# Altium PCB Micro+Complete+Ver1.3.pcbdoc
Units mil, origin at the board's own origin, x right, y up, seen from the top; angles counter-clockwise.
Board outline 3500 x 2200 mil, 2 copper layers (Top Layer, Bottom Layer); 49 components, 71 nets, 195 pads, 92 vias.
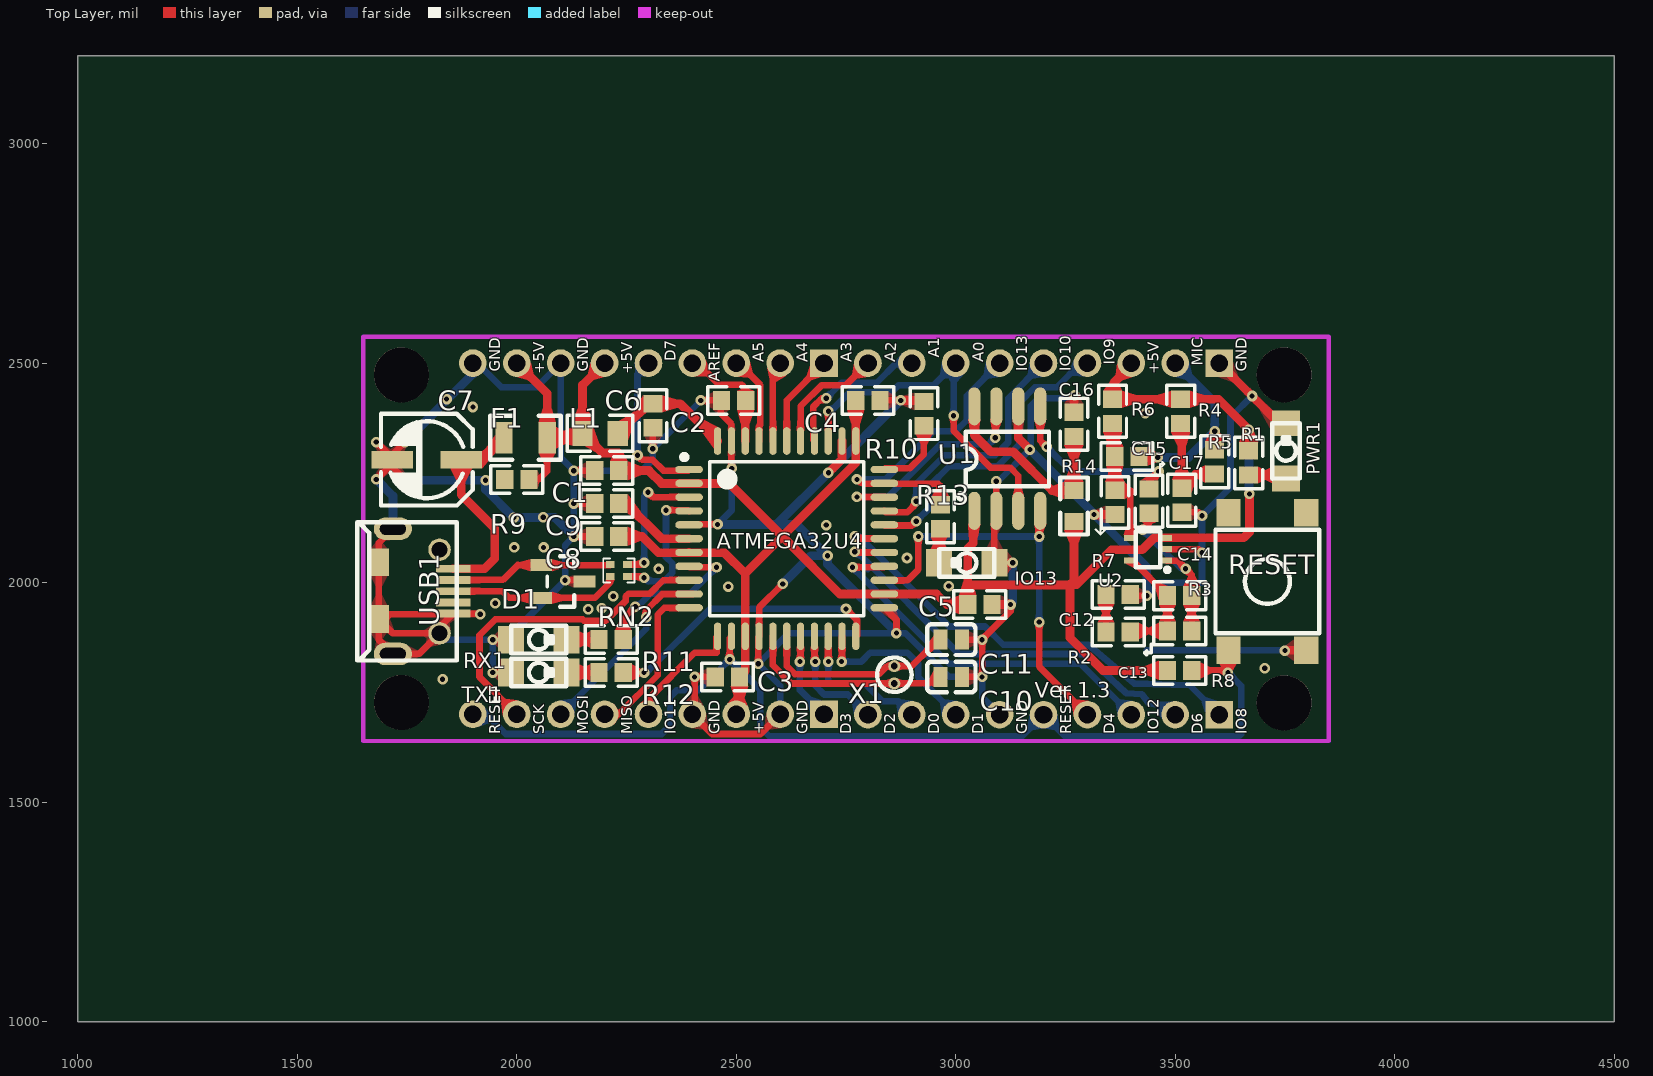
[diagram p0: Top Layer view]
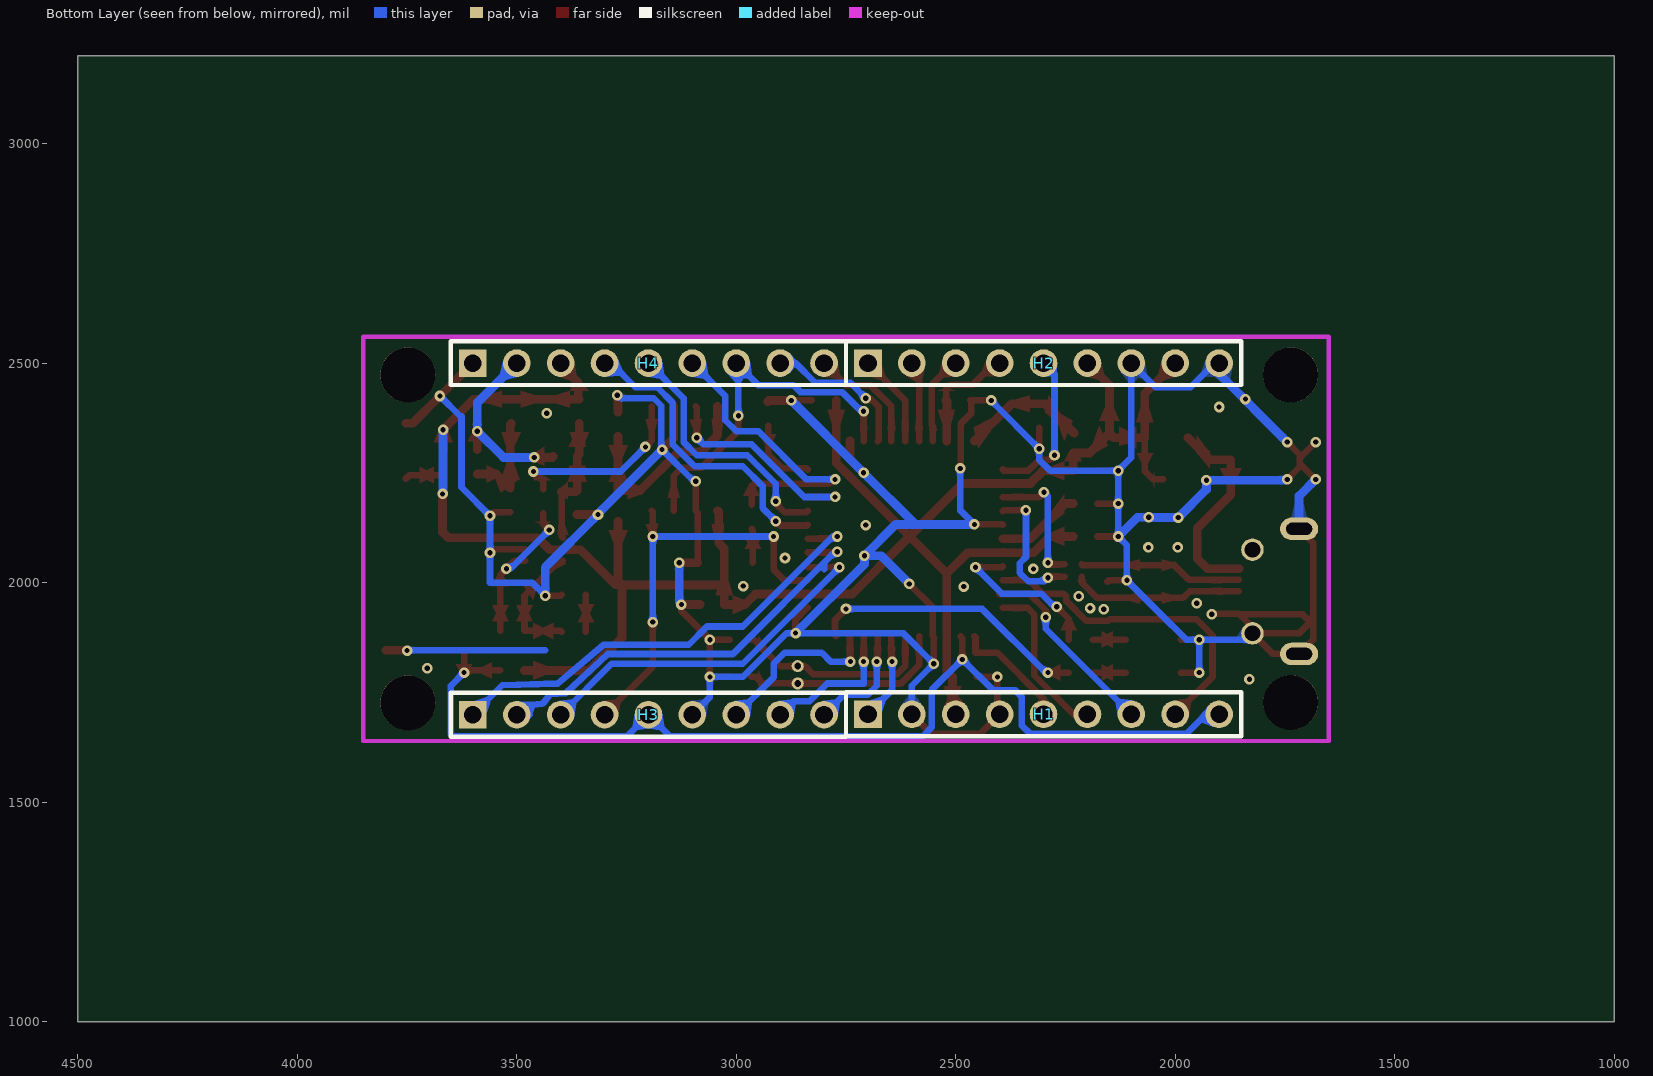
[diagram p1: Bottom Layer view, seen from below]

## Layer stack, top to bottom
Top Layer: signal copper (thickness not stored)
Dielectric: dielectric 12.6, FR-4, Dk 4.8
Bottom Layer: signal copper (thickness not stored)

## Board outline
4500,1000 1000,1000 1000,3200 4500,3200

## Components (designator, comment, footprint, x,y, rotation, side; value= is the part's Value field where it differs from the comment)
ATMEGA32U4 "ATMEGA32U4-AU" QFP-44_10X10X08P 2615,2100 r0 top
C1 "100nF" 0603 2205,2255 r0 top
C2 "100nF" 0603 2494,2415 r0 top
C3 "100nF" 0603 2480,1785 r0 top
C4 "100nF" 0603 2800,2415 r180 top
C5 "100nF" 0603 3055,1950 r180 top
C6 "1uF" 0603 2310,2380 r90 top
C7 "22uF" CAP-SMD_BD5.0-L5.3-W5.3-FD 1795,2280 r180 top
C8 "100nF" 0603 2205,2105 r0 top
C9 "1uF" 0603 2205,2180 r180 top
C10 "22pF" CAP_0603 2990,1785 r0 top
C11 "22pF" CAP_0603 2990,1870 r180 top
C12 "1uF" 0603 3370,1972.5 r0 top
C13 "100pF" 0603 3510,1890 r180 top
C14 "100nF" 0603 3515,2187.5 r270 top
C15 "10nF" 0603 3390,2287.5 r180 top
C16 "33pF" 0603 3269.25,2360.56 r270 top
C17 "10nF" 0603 3440,2185.44 r90 top
D1 "AZ5125-02S.R7G" SOT-23-3_L2.9-W1.6-P1.90-LS2.8-BR 2105,2002.5 r180 top
F1 "SMD1206P050TF/15" FUSE-1206 2020,2330 r0 top
H1 "A2541WV-9P" SIP-2.54MM-9P-CJT-H8.54 2300,1700 r180 bottom
H2 "A2541WV-9P" SIP-2.54MM-9P-CJT-H8.54 2300,2500 r180 bottom
H3 "A2541WV-9P" SIP-2.54MM-9P-CJT-H8.54 3200,1699 r180 bottom
H4 "A2541WV-9P" SIP-2.54MM-9P-CJT-H8.54 3200,2500 r180 bottom
IO13 "LTST-C21KGKT" LED-SMD-3.2X1.6X1.1 3025,2045 r180 top
L1 "30Ω" 0805 2190,2340 r0 top
PWR1 "LTST-C21TBKT" LED-SMD-3.2X1.6X1.1 3752.5,2300 r90 top
R1 "1K" 0603 3667.5,2272.5 r270 top
R2 "10K" 0603 3370,1887.5 r0 top
R3 "100K" 0603 3510,1970 r0 top
R4 "2K" 0603 3512.5,2390 r90 top
R5 "2K" 0603 3590,2275 r270 top
R6 "1M" 0603 3357.5,2390 r90 top
R7 "1M" 0603 3362.5,2182.5 r90 top
R8 "10K" 0603 3510,1800 r180 top
R9 "10K" 0603 2000.06,2235 r0 top
R10 "1K" 0603 2927.5,2385 r90 top
R11 "1K" 0603 2215,1870 r180 top
R12 "1K" 0603 2215,1795 r180 top
R13 "1K" 0603 2965,2150 r270 top
R14 "200K" R0603 3269.25,2174.43 r270 top
RESET "TSA063G50-250" SW-SMD-T6X6-9.5X5.8 3710,2002.5 r90 top
RN2 "22" RES-ARRAY-SMD_0402-4P-L1.0-W1.0-BL 2232.5,2027.5 r90 top
RX1 "LTST-C21KSKT" LED-SMD-3.2X1.6X1.1 2050,1870 r0 top
TX1 "LTST-C21KSKT" LED-SMD-3.2X1.6X1.1 2050,1795 r0 top
U1 "MSGEQ7SOIC" SOIC-8 3117.5,2282.5 r90 top
U2 "MAX4466EXK+T" SC-70-5 3438,2076 r90 top
USB1 "micro USBFemale" MICRO-USB-1 1770,1980 r180 top
X1 "16MHz" TXAL-1.9*6 2860,1790 r90 top

## Footprints (in the part's own frame and the unit in brackets; to place one, negate y for a bottom-side part, rotate by r counter-clockwise, add the part's x,y. Pads: shape width x height; smd on the part's side, far side on the other; paste and mask are expansions set on the pad)
0603 [mm]
  rect 1x1.1 smd: 1(-0.7,0) 2(0.7,0)
  silkscreen extent -1.5,-0.8 1.5,0.8
0805 [mm]
  rect 1.16x1.45 smd: 1(-1.016,0) 2(1.016,0)
  silkscreen extent -1.9,-1.03 1.87,1.04
CAP-SMD_BD5.0-L5.3-W5.3-FD [mm]
  rect 2.4x1 smd: 1(-2,0) 2(2,0)
  silkscreen extent -2.65,-2.65 2.65,2.65
CAP_0603 [mm]
  rect 0.8x1.15 smd: 1(-0.625,0) 2(0.625,0)
  silkscreen extent -1.4,-0.89 1.4,0.89
FUSE-1206 [mm]
  rect 1x1.801 smd: 1(-1.25,0) 2(1.25,0)
  silkscreen extent -2.03,-1.27 2.03,1.27
LED-SMD-3.2X1.6X1.1 [mm]
  rect 1.5x1.6 smd: 1(-1.6,0) 2(1.6,0)
  silkscreen extent -1.6,-0.8 1.6,0.8
MICRO-USB-1 [mm]
  round 1.3 hole 0.9: 0(-1.371,2.431) 0(-1.371,-2.41)
  oval 2.2x1.3 hole 0.7 slot 1.5 at 0 deg: 0(1.329,3.619) 0(1.329,-3.619)
  rect 1.2x1.6 smd: 0(2.14,-1.683) 0(2.156,1.596)
  rect 2x0.45 smd: 1(-2.156,-1.31) 2(-2.156,-0.66) 3(-2.156,-0.01) 4(-2.156,0.64) 5(-2.156,1.29)
  silkscreen extent -2.36,-4 3.4,4
QFP-44_10X10X08P [mm]
  oval 1.6x0.42 smd: 1(-5.65,4) 2(-5.65,3.2) 3(-5.65,2.4) 4(-5.65,1.6) 5(-5.65,0.8) 6(-5.65,0) 7(-5.65,-0.8) 8(-5.65,-1.6) 9(-5.65,-2.4) 10(-5.65,-3.2) 11(-5.65,-4) 23(5.65,-4) 24(5.65,-3.2) 25(5.65,-2.4) 26(5.65,-1.6) 27(5.65,-0.8) 28(5.65,0) 29(5.65,0.8) 30(5.65,1.6) 31(5.65,2.4) 32(5.65,3.2) 33(5.65,4)
  oval 0.42x1.6 smd: 12(-4,-5.65) 13(-3.2,-5.65) 14(-2.4,-5.65) 15(-1.6,-5.65) 16(-0.8,-5.65) 17(0,-5.65) 18(0.8,-5.65) 19(1.6,-5.65) 20(2.4,-5.65) 21(3.2,-5.65) 22(4,-5.65) 34(4,5.65) 35(3.2,5.65) 36(2.4,5.65) 37(1.6,5.65) 38(0.8,5.65) 39(0,5.65) 40(-0.8,5.65) 41(-1.6,5.65) 42(-2.4,5.65) 43(-3.2,5.65) 44(-4,5.65)
  silkscreen extent -6.08,-4.45 4.45,4.87
R0603 [mm]
  rect 1x1.1 smd: 1(-0.9,0) 2(0.9,0)
  silkscreen extent -1.65,-0.8 1.65,0.8
RES-ARRAY-SMD_0402-4P-L1.0-W1.0-BL [mm]
  rect 0.389x0.5 smd: 1(-0.35,-0.5) 2(0.35,-0.5) 3(0.35,0.5) 4(-0.35,0.5)
  silkscreen extent -0.7,-0.9 0.7,0.9
SC-70-5 [mil]
  rect 13.8x23.62 smd: 1(-26,-43) 2(0,-43) 3(26,-43) 4(26,43) 5(-26,43)
  silkscreen extent -52,-49 41,28
SIP-2.54MM-9P-CJT-H8.54 [mm]
  rect 1.6x1.6 hole 1.02: 1(-10.16,0)
  round 1.6 hole 1.02: 2(-7.62,0) 3(-5.08,0) 4(-2.54,0) 5(0,0) 6(2.54,0) 7(5.08,0) 8(7.62,0) 9(10.16,0)
  silkscreen extent -11.43,-1.27 11.43,1.27
SOIC-8 [mm]
  oval 2.2x0.7 smd: 1(-3.023,1.905) 2(-3.023,0.635) 3(-3.023,-0.635) 4(-3.023,-1.905) 5(3.023,-1.905) 6(3.023,-0.635) 7(3.023,0.635) 8(3.023,1.905)
  silkscreen extent -2.37,-2.41 1.55,2.83
SOT-23-3_L2.9-W1.6-P1.90-LS2.8-BR [mm]
  rect 1.25x0.7 smd: 1(1.25,-0.95) 2(1.25,0.95) 3(-1.25,0)
  silkscreen extent -0.65,-1.46 0.9,1.46
SW-SMD-T6X6-9.5X5.8 [mm]
  rect 1.6x1.4 smd: 1(-3.975,2.249) 2(3.975,2.249) 3(-3.975,-2.249) 4(3.975,-2.249)
  silkscreen extent -3,-3 3,3
TXAL-1.9*6 [mm]
  round 0.7 hole 0.4: 1(-0.5,0) 2(0.5,0)
  silkscreen extent -1,-1 1,1

## Free pads (board coordinates)
  round 125 hole 125 unplated: ""(1737,1727) ""(1737,2473) ""(3748,1726) ""(3748,2473)

## Via types
v1: diameter 24, hole 12, Top Layer to Bottom Layer, 92 vias

## Nets (pads, with @x,y where several pads share a name; then routed paths per layer and width w, separated by ;. In a path a pad name is that pad's centre, name@x,y a point inside that pad or via, vN(x,y) a via of type N, cw(c..) or ccw(c..) an arc to the next point about the centre after c; other vN are vias at no path point)
+5V: ATMEGA32U4.2 ATMEGA32U4.7 ATMEGA32U4.14 ATMEGA32U4.24 ATMEGA32U4.34 C1.2 C3.2 C4.2 C5.2 C8.2 F1.2 H1.3 H2.6 H2.8 H4.3 L1.1 R1.1 R4.2 R6.2 R8.2 R9.2 R14.2 U1.1 U2.3 | length 4957.3
  Top Layer w15: R9.2 2050,2235 2069.2,2254.2 F1.2
  Top Layer w20: H2.8 2069.21,2430.79 F1.2 2140,2330 L1.1 ; H2.6 2150,2450 L1.1 ; C8.2 2286,2105 2323,2068 ATMEGA32U4.7@2392.1,2068 ; ATMEGA32U4.7 ATMEGA32U4.7@2392.1,2068 ; H1.3 2507.56,1707.56 C3.2 2520.51,1797.95 ATMEGA32U4.14 2520.51,2020.51 ; C4.2 ATMEGA32U4.34@2772.44,2322.48 ; ATMEGA32U4.34 ATMEGA32U4.34@2772.44,2322.48 ; 3027.45,1994.52 3259.52,1994.52 3260,1995 ; U1.1 3040,2161 3040,2090 3027.45,2077.45 C5.2 2980,1950 2955.98,1974.02 ATMEGA32U4.24 2735.98,1974.02 2615,2095 2484,2226 ATMEGA32U4.2 2330,2226 2301,2255 2232.5,2255 2232.5,2295.4 2194.6,2295.4 L1.1 ; R14.2@3269.25,2139 3269.25,2004.25 3260,1995 ; H4.3 3400,2495 3360,2455 3360,2420.05 R6.2 R4.2 3598.45,2417.55 v1(3668,2348) 3667.5,2347.5 R1.1 ; R8.2 3335,1800 3260,1875 3260,1995 ; v1(3669,2202) 3669,2115 3656,2102 U2.3 3452,2102 3425,2075 3355,2075 3275,1995 3260,1995 ; ATMEGA32U4.7@2392.1,2068 2473.02,2068 2520.51,2020.51 ; 2520.51,2020.51 2772.44,2272.44 ATMEGA32U4.34@2772.44,2322.48
  Bottom Layer w20: v1(3668,2348) 3668,2203 v1(3669,2202)
A0: ATMEGA32U4.36 H4.7 U1.3 | length 829.4
  Top Layer w15: ATMEGA32U4.36 2710,2322.9 v1(2710,2390) ; v1(2995,2380) 2995,2346 3079,2262 3124,2262 3142.5,2243.5 U1.3
  Bottom Layer w15: v1(2710,2390) 2715,2390 2758.93,2433.93 2853.93,2433.93 2870,2450 2950,2450 H4.7 2995,2495 v1(2995,2380)
A1: ATMEGA32U4.37 H4.8 | length 345.4
  Top Layer w15: ATMEGA32U4.37 2675,2325.4 2675,2400.2 2694.8,2420 v1(2705,2420)
  Bottom Layer w15: v1(2705,2420) 2740,2455 2820,2455 2865,2500 H4.8
A2: ATMEGA32U4.38 H4.9 | length 273.4
  Top Layer w15: ATMEGA32U4.38 2646.5,2401.5 2695,2450 2750,2450 H4.9
A3: ATMEGA32U4.39 H2.1 | length 212.8
  Top Layer w15: ATMEGA32U4.39 2615,2415 H2.1
A4: ATMEGA32U4.40 H2.2 | length 184.4
  Top Layer w15: ATMEGA32U4.40 2583.5,2483.5 H2.2
A5: ATMEGA32U4.41 H2.3 | length 204.5
  Top Layer w15: H2.3 2505,2500 2555,2450 2555,2360 2552.01,2357.01 ATMEGA32U4.41
AREF: ATMEGA32U4.42 C2.2 H2.4 | length 265.9
  Top Layer w15: H2.4 2412,2500 2461.78,2450.22 2512.78,2450.22 2521.56,2441.44 C2.2
  Top Layer w20: ATMEGA32U4.42 2520,2412.5 C2.2@2522.5,2415
AVCC2: ATMEGA32U4.44 C6.2 L1.2 | length 290.8
  Top Layer w20: L1.2 2297.56,2407.56 C6.2 2372.4,2407.56 ATMEGA32U4.44
C12_1: C12.1 R2.1 | length 85
  Top Layer w15: R2.1 C12.1
D0/RX: ATMEGA32U4.20 H3.8 | length 327.2
  Top Layer w15: ATMEGA32U4.20 2709.49,1820.51 v1(2710,1820)
  Bottom Layer w15: v1(2710,1820) 2710,1770 2792.71,1770 2832.71,1730 2869,1730 H3.8
D1/TXT: ATMEGA32U4.21 H3.7 | length 402.8
  Top Layer w15: v1(2740,1820) 2740.98,1820.98 ATMEGA32U4.21
  Bottom Layer w15: v1(2740,1820) 2785,1820 2805,1840 2890,1840 2915,1815 2915,1784 H3.7
D2/SDA: ATMEGA32U4.19 H3.9 | length 260.7
  Top Layer w15: ATMEGA32U4.19 2677.99,1822.01 v1(2680,1820)
  Bottom Layer w15: v1(2680,1820) 2680,1765 2700,1745 2754,1745 H3.9
D3/SCL: ATMEGA32U4.18 H1.1 | length 201
  Top Layer w15: v1(2645,1820) 2646.5,1821.5 ATMEGA32U4.18
  Bottom Layer w15: v1(2645,1820) 2645,1755 H1.1
D4*: ATMEGA32U4.25 H3.4 U1.4 | length 949.2
  Top Layer w15: ATMEGA32U4.25 2837.95,2005 2890,2005 2915,2030 v1(2915,2105) ; v1(3190,1910) 3190,1809 H3.4 ; v1(3190,2105) 3190,2161 U1.4
  Bottom Layer w15: v1(2915,2105) v1(3190,2105) v1(3190,1910)
D5*: ATMEGA32U4.31 U1.7 | length 506.1
  Top Layer w15: v1(2775,2195) 2836.93,2195 ATMEGA32U4.31 ; v1(3090,2330) 3090,2399 U1.7
  Bottom Layer w15: v1(2775,2195) 2845,2195 2965,2315 3075,2315 v1(3090,2330)
D6*: ATMEGA32U4.27 H3.2 | length 988.5
  Top Layer w15: v1(2770,2070) 2771.5,2068.5 ATMEGA32U4.27
  Bottom Layer w15: v1(2770,2070) 2775,2070 3007.75,1837.25 3292.75,1837.25 3388,1748 3424,1746 3439.89,1725.11 3443,1724 3479,1720 H3.2 H3.2@3471,1699 ; 2799.8,2030 2799.8,2040.2
D7: ATMEGA32U4.1 H2.5 | length 353.5
  Top Layer w15: v1(2275,2290) 2285.6,2279.4 2309.9,2279.4 2334.3,2255 2390.1,2255 ATMEGA32U4.1
  Bottom Layer w15: v1(2275,2290) 2275,2475 H2.5
D+: ATMEGA32U4.4 RN2.1 | length 316.4
  Top Layer w15: RN2.1 2287.28,2013.72 v1(2290,2011) ; v1(2340,2165) 2390.6,2165 ATMEGA32U4.4
  Bottom Layer w15: v1(2290,2011) 2298,2003 2335,2003 2354,2022 2354,2044 2340,2058 v1(2340,2165)
D-: ATMEGA32U4.3 RN2.2 | length 302.5
  Top Layer w15: RN2.2 2286.28,2041.28 v1(2290,2045) ; v1(2299,2206) 2310.5,2194.5 ATMEGA32U4.3
  Bottom Layer w15: v1(2290,2045) 2290,2197 v1(2299,2206)
GND: ATMEGA32U4.5 ATMEGA32U4.15 ATMEGA32U4.23 ATMEGA32U4.35 ATMEGA32U4.43 C1.1 C2.1 C3.1 C4.1 C5.1 C6.1 C7.2 C8.1 C9.2 C10.2 C11.1 C12.2 C14.2 C16.1 D1.3 H1.2 H1.4 H2.7 H2.9 H3.6 H4.1 IO13.1 PWR1.2 R7.1 R9.1 R10.2 RESET.3 RX1.1 TX1.1 U1.2 U1.6 U2.2 USB1.0 USB1.5 | length 9894.5
  Top Layer w15: v1(1680,2235) 1716.3,2271.3 C7.2 ; v1(1680,2320) 1716.3,2283.7 C7.2 ; USB1.0@1717.7,2122.5 1685.8,2090.6 1685.8,2046.3 1685.8,1917.8 USB1.0@1685.1,1917.2 ; v1(1745,2235) 1716.3,2263.7 C7.2 ; v1(1745,2320) 1716.3,2291.3 C7.2 ; v1(1917,1928) 1915.8,1929.2 USB1.5 ; v1(1945,1795) TX1.1 ; v1(1945,1870) RX1.1 ; v1(2110,2005) 2151.7,2005 D1.3 ; v1(2130,2105) C8.1 ; v1(2130,2180) C9.2 ; v1(2130,2255) C1.1 ; v1(2310,2305) C6.1 ; ATMEGA32U4.5 2393.6,2132.5 v1(2457.5,2132.5) ; v1(2419,2415) C2.1 2465,2413.6 2465,2385 2489,2361 ATMEGA32U4.43 2489,2261 v1(2490,2260) ; C3.1 v1(2405,1785) 2405,1705 cw(c2400,1705) H1.4 2445,1655 2555,1655 H1.2 ; v1(2550,1815) 2550,1875.5 ATMEGA32U4.15 ; ATMEGA32U4.15 2552.01,1943.01 v1(2606,1997) ; C4.1 v1(2875,2415) ; ATMEGA32U4.23 2865,1915 v1(2865,1885) ; C10.2 v1(3060,1785) v1(3060,1870) ; C11.1 v1(3060,1870) ; IO13.1 3088,2159 U1.2 3092.5,2230.5 v1(3092,2231) ; v1(3125,1950) 3125,1935 v1(3060,1870) ; C12.2 3400.1,1970 v1(3435,1970) ; U2.2 3553,2076 v1(3561,2068) ; C14.2 3553.1,2159.9 v1(3561,2152) ; USB1.0@1685.1,1917.2 1718,1884.3 USB1.0@1824,1884.3 ; USB1.0@1685.1,1917.2 1685.1,1870.1 1717.7,1837.5 1777.2,1837.5 USB1.0@1824,1884.3 ; USB1.0@1685.1,1917.2 1699.7,1917.2 1710,1927.5 1853.1,1927.5 USB1.5 ; USB1.0@1824,1884.3 1824,1898.3 USB1.5
  Top Layer w20: v1(2710,2250) 2741,2281 ATMEGA32U4.35 ; v1(2875,2415) 2925.1,2415 R10.2 ; C5.1 v1(3125,1950) ; IO13.1 v1(3130,2045) ; U1.6 3142.5,2329.5 v1(3169,2303) ; C16.1 3269.2,2425.2 v1(3271,2427) ; v1(3315,2155) 3362.4,2155 R7.1 ; H4.1 v1(3675,2425) 3737,2363 PWR1.2 ; v1(3750,1845) 3751,1846 RESET.3@3798.5,1846
  Bottom Layer w15: USB1.0@1823.99,1884.3 1838.29,1870 v1(1945,1870) ; H2.9 1910,2500 1965,2445 2045,2445 H2.7 2100,2285 v1(2130,2255) ; v1(1945,1795) v1(1945,1870) ; v1(2419,2415) 2419,2414 v1(2310,2305) 2310,2280 2285,2255 v1(2130,2255) ; v1(2457.5,2132.5) 2490,2165 v1(2490,2260) ; H1.2 2600,1765 v1(2550,1815) 2620,1885 v1(2865,1885) 2885,1885 2985,1785 v1(3060,1785) 3060,1739 H3.6 ; v1(3092,2231) 3097,2231 v1(3169,2303) 3171,2305 3171,2403 3188,2420 3264,2420 v1(3271,2427) ; 3435,1846.22 3748.78,1846.22 v1(3750,1845) ; v1(3435,1970) 3465,2000 3561,2000 v1(3561,2068) v1(3561,2152) 3626,2217 3626,2379 3629,2379 v1(3675,2425) ; v1(1945,1870) 1975,1870 2037,1932 v1(2110,2005) 2110,2085 v1(2130,2105) v1(2130,2180) v1(2130,2255)
  Bottom Layer w20: v1(1680,2235) 1717.7,2197.3 USB1.0@1717.7,2122.5 ; v1(1745,2235) 1747,2233 v1(1929,2233) 1929,2212 v1(1993,2148) v1@2060,2148 ; v1(1745,2320) 1900,2475 H2.9 ; v1(2060,2149) 2086,2149 v1(2130,2105) ; v1(2457.5,2132.5) 2636.5,2132.5 v1(2708,2061) ; 2591.56,2132.5 2592.5,2132.5 v1(2710,2250) v1(2875,2415) ; v1(2606,1997) 2670,2061 v1(2708,2061) ; v1(2865,1885) 2708,2042 v1(2708,2061) ; v1(3125,1950) 3130,1955 v1(3130,2045) ; v1(3169,2303) 3315,2157 v1(3315,2155) 3435,2035 v1(3435,1970)
  other v1: 1831,1780 3704,1805 2163,1939 2194,1942 1951,1953 2220,1969 2482,1991 2984,1992 2323,2031 2889,2056 1994,2080 2061,2080 2705,2131 3432,2386 1900,2400 1840,2418
HWB: ATMEGA32U4.33 R10.1 | length 169.5
  Top Layer w15: ATMEGA32U4.33 2840,2260 2895,2260 2927.5,2292.5 R10.1
IO8: ATMEGA32U4.28 H3.1 | length 1061.7
  Top Layer w15: v1(2770,2105) 2774.92,2100.08 ATMEGA32U4.28@2837.44,2100.08
  Bottom Layer w15: v1(2770,2105) 2780,2105 2985,1900 3066.7,1900 3108.3,1858.3 3301.7,1858.3 3407,1770 3532.9,1766.1 H3.1
IO9*: ATMEGA32U4.29 H4.4 | length 701.4
  Top Layer w15: ATMEGA32U4.29 2838.94,2130 2900,2130 v1(2910,2140)
  Bottom Layer w15: v1(2910,2140) 2940,2170 2940,2220 2985,2265 3095,2265 3145,2315 3145,2410 3180,2445 3230,2445 3285,2500 H4.4
IO10*: ATMEGA32U4.30 H4.5 | length 589.6
  Top Layer w15: ATMEGA32U4.30 2840.43,2160 2890,2160 2910,2180 v1(2910,2185)
  Bottom Layer w15: v1(2910,2185) 2910,2225 2975,2290 3090,2290 3120,2320 3120,2420 H4.5
IO11*: ATMEGA32U4.12 H1.5 | length 272.1
  Top Layer w15: H1.5 2300,1735 2405,1840 2455,1840 2455,1875 ATMEGA32U4.12
IO12*/PD6: ATMEGA32U4.26 H3.3 | length 847.4
  Top Layer w15: v1(2765,2035) 2835.43,2035 ATMEGA32U4.26
  Bottom Layer w15: v1(2765,2035) 2985,1815 3284,1815 H3.3
IO13: ATMEGA32U4.32 H4.6 R13.1 | length 706.4
  Top Layer w15: v1(2775,2235) 2780,2235 2790,2225 2836.46,2225 ATMEGA32U4.32 2838.42,2225 2960,2225 2965,2220 R13.1
  Bottom Layer w15: v1(2775,2235) 2840,2235 2950,2345 3000,2345 3025,2370 3025,2425 H4.6
IO13_2: IO13.2 R13.2 | length 78.7
  Top Layer w15: IO13.2 2962.01,2119.45 R13.2
MIC: C15.1 H4.2 R5.1 | length 433
  Top Layer w20: C15.1 3420.06,2285 v1(3460,2285) ; R5.1 v1(3590,2345)
  Bottom Layer w20: v1(3460,2285) 3530,2285 v1(3590,2345) 3590,2410 H4.2
MICAUDIO: C13.1 C17.1 R3.2 U2.1 | length 375.3
  Top Layer w15: v1(3426,2120) 3440,2134 C17.1 ; U2.1 3505,2050 v1(3523.5,2031.5) 3537.6,2017.4 R3.2 ; C13.1 R3.2
  Bottom Layer w15: v1(3426,2120) 3514.5,2031.5 v1(3523.5,2031.5)
MISO: ATMEGA32U4.11 H1.6 | length 373.9
  Top Layer w15: H1.6 2232,1700 2321,1789 2321,1927 2336.5,1942.5 ATMEGA32U4.11
MOSI: ATMEGA32U4.10 H1.7 | length 439.1
  Top Layer w15: v1(2295,1921) 2295,1937 2332,1974 ATMEGA32U4.10 ; ATMEGA32U4.10 ATMEGA32U4.10@2400.98,1974.02
  Bottom Layer w15: H1.7 2295,1895 v1(2295,1921)
null: 
PWR1_1: PWR1.1 R1.2 | length 88.3
  Top Layer w15: R1.2 3744.57,2244.94 PWR1.1
R4_1: C14.1 R4.1 R5.2 | length 236.8
  Top Layer w20: R4.1 3515,2359.94 C14.1 3547.38,2247.44 R5.2
RESET: ATMEGA32U4.13 H1.9 H3.5 R8.1 RESET.1 | length 2384.8
  Top Layer w15: v1(2485,1825) 2485,1873.54 ATMEGA32U4.13 ; R8.1 3615,1800 v1(3620,1795) 3620,1844.55 RESET.1
  Bottom Layer w15: H1.9 1930,1700 1975,1655 2330,1655 2350,1675 2350,1740 2365,1755 2415,1755 v1(2485,1825) 2555,1755 2555,1670 2575,1650 3151,1650 H3.5 3249,1650 3645,1650 3650,1655 3650,1765 v1(3620,1795)
RX1: ATMEGA32U4.8 R11.1 | length 371.9
  Top Layer w15: R11.1 2242.56,1917.56 v1(2270,1945) ; ATMEGA32U4.8 2394.57,2035 v1(2455,2035)
  Bottom Layer w15: v1(2270,1945) 2275,1945 2305,1975 2395,1975 v1(2455,2035)
RX1_2: R11.2 RX1.2 | length 74.5
  Top Layer w15: RX1.2 R11.2
S$29: 
S$31: 
S$67: 
S$69: 
S$80: 
S$82: 
S$84: 
S$86: 
S$1945: 
S$1948: 
S$1950: 
S$1952: 
S$1955: 
S$1957: 
S$1959: 
S$1961: 
S$1973: 
S$1975: 
S$1977: 
SCK: ATMEGA32U4.9 H1.8 | length 753.1
  Top Layer w15: H1.8 1915,1785 1915,1880 1951,1916 2149.89,1916 2152.89,1913 2203,1913 2248,1958 2248,1968 2255,1975 2303.2,1975 2333.71,2005.51 ATMEGA32U4.9
TX1: ATMEGA32U4.22 R12.1 | length 641.3
  Top Layer w15: R12.1 v1(2290,1795) ; v1(2750,1940) 2775,1915 2775,1880.08 ATMEGA32U4.22
  Bottom Layer w15: v1(2290,1795) 2295,1795 2440,1940 v1(2750,1940)
TX1_2: R12.2 TX1.2 | length 74.5
  Top Layer w15: TX1.2 R12.2
U1_5: C17.2 U1.5 | length 425.8
  Top Layer w15: U1.5 3192.5,2323.5 v1(3207,2309) ; C17.2 3440,2231 v1(3462,2253)
  Bottom Layer w15: v1(3207,2309) 3263,2253 v1(3462,2253)
U1_8: C16.2 R14.1 U1.8 | length 467.9
  Top Layer w20: U1.8 3042.5,2335.5 3080,2298 3131,2298 3219.13,2209.87 3269.25,2209.87 C16.2
U2_4: C15.2 R6.1 R7.2 U2.4 | length 297.5
  Top Layer w15: U2.4 3398,2105 3398,2207
  Top Layer w20: R6.1 3357.5,2292.45 C15.2 R7.2@3362.45,2210.1 ; R7.2 R7.2@3362.45,2210.1 ; 3398,2207 3365.55,2207 R7.2@3362.45,2210.1
U2_5: C13.2 R2.2 R3.1 U2.5 | length 286.5
  Top Layer w15: U2.5 3402.44,2050 R3.1 C13.2 3400.06,1890 R2.2
UCAP: ATMEGA32U4.6 C9.1 | length 193.1
  Top Layer w20: C9.1 2250,2180 2330,2100 ATMEGA32U4.6
USB1_1: C7.1 F1.1 USB1.1 | length 479.2
  Top Layer w20: USB1.1 1926.6,2031.6 1950,2055 1950,2124 1873.7,2200.3 C7.1 ; C7.1 1920.79,2280 F1.1
USB1_2: D1.1 RN2.3 USB1.2 | length 372.6
  Top Layer w15: USB1.2 1968.5,2006 2002.5,2040 2002.6,2039.9 D1.1 2211.43,2039.9 RN2.3
USB1_3: D1.2 RN2.4 USB1.3 | length 392.3
  Top Layer w15: USB1.3 1967.1,1980.4 1982.4,1965.1 D1.2 2177.4,1965.1 2177.5,1965 2212.8,2000.3 RN2.4
XTAL1: ATMEGA32U4.17 C11.2 X1.2 | length 458.5
  Top Layer w15: ATMEGA32U4.17 2615,1810 2633.9,1791.1 2825,1791.1 2843.6,1809.7 X1.2 2899.7,1809.7 2960,1870 C11.2
XTAL2: ATMEGA32U4.16 C10.1 X1.1 | length 471.4
  Top Layer w15: ATMEGA32U4.16 2583.5,1811.5 2625,1770 2859.7,1770 X1.1 2940,1770.3 2954.7,1785 C10.1
pads on no net: RESET.2 RESET.4 USB1.4

## Polygon pours and split planes (outlines as drawn)
GND on Bottom Layer (solid): 1500,2700 4000,2700 4000,1500 1500,1500
GND on Top Layer (solid): 1600,2600 3900,2600 3900,1600 1600,1600

## Other copper
Top Layer:
  region net +5V: 3404.56,2468.84 3368.51,2499.37 3364.63,2473.77 3379.94,2460.8
  region net A2: 2768.57,2501.97 2801.97,2468.57 2774.98,2464.38 2764.38,2474.98
  region net A4: 2613.79,2471.68 2570.18,2489.86 2576,2463.55 2591,2457.29
  region net A5: 2531.16,2504.56 2500.63,2468.51 2527.85,2466.54 2537.58,2478.02
  region net AREF: 2430.42,2508.15 2404.29,2468.8 2431.49,2469.9 2439.95,2482.65
  region net +5V: 2168.57,2501.97 2201.97,2468.57 2176.75,2462.61 2162.61,2476.75
  region net +5V: 1998.03,2468.57 2031.43,2501.97 2037.39,2476.75 2023.25,2462.61
  region net +5V: 2480.42,1724.67 2526.93,1716.34 2517.56,1740.42 2497.56,1744
  region net IO11*: 2323.62,1720.83 2276.38,1720.83 2292.5,1735 2307.5,1735
  region net MISO: 2220.83,1676.38 2220.83,1723.62 2232,1707.5 2232,1692.5
  region net SCK: 1968.57,1698.03 2001.97,1731.43 1974.98,1735.62 1964.38,1725.02
  region net D4*: 3268.57,1697.03 3301.97,1730.43 3274.98,1734.62 3264.38,1724.02
  region net XTAL2: 2851.05,1759.82 2850.72,1780.49 2841.12,1777.5 2841.36,1762.5
  region net XTAL2: 2869.11,1759.97 2869.11,1780.64 2878.76,1777.8 2878.76,1762.8
  region net XTAL1: 2869.11,1799.36 2869.11,1820.03 2878.76,1817.2 2878.76,1802.2
  region net XTAL1: 2850.89,1799.36 2850.89,1820.03 2843.6,1817.2 2843.6,1802.2
  region net D-: 2310.98,2206.75 2298.25,2194.02 2305.2,2189.2 2315.8,2199.8
  region net D+: 2347.94,2156 2347.94,2174 2356.34,2172.5 2356.34,2157.5
  region net D-: 2284.32,2034.43 2280.22,2051.96 2272.34,2048.78 2275.85,2033.78
  region net D+: 2283.67,2021.2 2280.68,2003.45 2272.62,2006.22 2275.16,2021.22
  region net RESET: 2476,1832.94 2494,1832.94 2492.5,1841.34 2477.5,1841.34
  region net A0: 2701,2382.06 2719,2382.06 2717.5,2373.66 2702.5,2373.66
  region net A1: 2700.39,2408.92 2694.59,2425.96 2686.84,2422.65 2692.23,2406.82
  region net A0: 2986,2372.06 3004,2372.06 3002.5,2363.66 2987.5,2363.66
  region net D7: 2286.98,2290.75 2274.25,2278.02 2280.3,2274.1 2290.9,2284.7
  region net RX1: 2270.75,1933.02 2258.02,1945.75 2253.14,1938.75 2263.75,1928.14
  region net TX1: 2282.06,1786 2282.06,1804 2273.66,1802.5 2273.66,1787.5
  region net RX1: 2447.06,2026 2447.06,2044 2438.66,2042.5 2438.66,2027.5
  region net MOSI: 2286,1928.94 2304,1928.94 2302.5,1937 2287.5,1937
  region net RESET: 3611,1802.94 3629,1802.94 3627.5,1811.34 3612.5,1811.34
  region net RESET: 3615.2,1806 3609.69,1788.86 3602.04,1792.5 3606.86,1807.5
  region net TX1: 2761.98,1940.75 2749.25,1928.02 2756.25,1923.14 2766.86,1933.75
  region net D3/SCL: 2654.69,1827.08 2636.77,1828.73 2639,1836.96 2654,1835.58
  region net D2/SDA: 2687.96,1828.98 2670.09,1826.77 2670.49,1835.28 2685.49,1837.14
  region net D0/RX: 2718.75,1828.21 2700.76,1827.65 2701.99,1836.09 2716.99,1836.56
  region net D1/TXT: 2749.46,1827.38 2731.49,1828.46 2733.48,1836.76 2748.48,1835.86
  region net IO12*/PD6: 2772.94,2026 2772.94,2044 2781.34,2042.5 2781.34,2027.5
  region net D6*: 2778.73,2078.23 2777.08,2060.31 2785.58,2061 2786.96,2076
  region net IO8: 2780.28,2111.19 2774.86,2094.03 2783.21,2092.58 2787.95,2107.58
  region net D4*: 2906,2097.06 2924,2097.06 2922.5,2088.66 2907.5,2088.66
  region net D4*: 3181,2112.94 3199,2112.94 3197.5,2121.34 3182.5,2121.34
  region net D4*: 3181,1902.06 3199,1902.06 3197.5,1893.66 3182.5,1893.66
  region net MIC: 3581,2337.06 3599,2337.06 3600,2328.66 3580,2328.66
  region net MIC: 3452.06,2276 3452.06,2294 3443.66,2295 3443.66,2275
  region net U1_5: 3207.75,2320.98 3195.03,2308.25 3190.15,2315.25 3200.75,2325.85
  region net D5*: 3081,2337.94 3099,2337.94 3097.5,2346.34 3082.5,2346.34
  region net IO9*: 2910.75,2128.02 2898.02,2140.75 2894.7,2135.3 2905.3,2124.7
  region net IO10*: 2898.14,2183.14 2913.33,2173.47 2907.7,2167.09 2894.74,2175.35
  region net IO13: 2786.53,2238.33 2776.86,2223.14 2784.65,2219.74 2792.91,2232.7
  region net D5*: 2782.94,2186 2782.94,2204 2791.34,2202.5 2791.34,2187.5
  region net MICAUDIO: 3524.25,2043.48 3511.52,2030.75 3506.65,2037.75 3517.25,2048.35
  region net MICAUDIO: 3535.48,2032.25 3522.75,2019.52 3529.75,2014.64 3540.36,2025.25
  region net MICAUDIO: 3437.98,2119.25 3425.25,2131.98 3432.25,2136.86 3442.86,2126.25
  region net U1_5: 3462.75,2241.02 3450.03,2253.75 3445.15,2246.75 3455.75,2236.15
  region net +5V: 3676.75,2339.79 3658.76,2340.34 3657.5,2331.98 3677.5,2331.37
  region net +5V: 3668.75,2359.98 3656.02,2347.25 3649.37,2352.48 3663.52,2366.62
  region net +5V: 3660,2194.06 3678,2194.06 3679,2185.66 3659,2185.66
  region net A3: 2695.02,2468.5 2668.5,2495.02 2660.55,2471.16 2671.16,2460.55
  region net R4_1: 3534.16,2342.75 3490.84,2342.75 3505,2312.75 3525,2312.75
  region net +5V: 3490.84,2397.87 3490.84,2437.24 3460.84,2427.55 3460.84,2407.55
  region net +5V: 3534.16,2437.24 3534.16,2397.87 3564.16,2407.55 3564.16,2427.55
  region net U2_4: 3379.16,2342.75 3335.84,2342.75 3347.5,2312.75 3367.5,2312.75
  region net +5V: 3379.16,2437.24 3379.16,2397.87 3409.16,2407.55 3409.16,2427.55
  region net +5V: 3335.84,2437.24 3379.16,2437.24 3370,2455 3350,2455
  region net USB1_1: 1951.1,2294.55 1951.1,2335.31 1921.1,2294.45 1921.1,2266.17
  region net +5V: 2088.9,2355 2088.9,2305 2118.9,2320 2118.9,2340
  region net +5V: 2049.53,2365.45 2088.9,2365.45 2079.21,2395.45 2059.21,2395.45
  region net +5V: 2087.95,2294.55 2050.45,2294.55 2061.7,2272.05 2076.7,2272.05
  region net USB1_1: 1920.98,2299.69 1920.98,2260.31 1950.98,2296.05 1950.98,2324.34
  region net USB1_1: 1898.7,2260.31 1848.7,2260.31 1863.7,2230.31 1883.7,2230.31
  region net +5V: 2252.24,2126.65 2252.24,2083.35 2282.24,2095 2282.24,2115
  region net USB1_3: 2031.19,1951.32 2031.19,1978.88 2008.69,1972.6 2008.69,1957.6
  region net USB1_3: 2080.41,1978.88 2080.41,1951.32 2102.91,1957.6 2102.91,1972.6
  region net USB1_2: 2031.19,2026.12 2031.19,2053.68 2008.69,2047.4 2008.69,2032.4
  region net USB1_2: 2080.41,2053.68 2080.41,2026.12 2102.91,2032.4 2102.91,2047.4
  region net RX1_2: 2142.52,1888.75 2142.52,1851.25 2165.02,1862.5 2165.02,1877.5
  region net TX1_2: 2142.52,1813.75 2142.52,1776.25 2165.02,1787.5 2165.02,1802.5
  region net USB1_3: 1894.25,1989.27 1894.25,1971.55 1916.75,1972.9 1916.75,1987.9
  region net USB1_2: 1894.25,2014.86 1894.25,1997.14 1916.75,1998.5 1916.75,2013.5
  region net PWR1_1: 3721.01,2226.19 3721.01,2263.69 3698.51,2252.44 3698.51,2237.44
  region net +5V: 2527.24,1763.35 2487.87,1763.35 2497.56,1733.35 2517.56,1733.35
  region net +5V: 3007.76,1971.65 3047.13,1971.65 3037.45,2001.65 3017.45,2001.65
  region net +5V: 3007.76,1928.35 3007.76,1971.65 2980,1960 2980,1940
  region net UCAP: 2252.25,2201.65 2252.25,2158.35 2282.25,2133.61 2282.25,2161.89
  region net +5V: 2127.17,2311.46 2127.17,2355 2097.17,2340 2097.17,2320
  region net +5V: 2172.83,2357.48 2153.28,2311.46 2179.47,2296.38 2187.91,2316.23
  region net +5V: 2127.17,2368.54 2172.83,2368.54 2160,2398.54 2140,2398.54
  region net AVCC2: 2233.28,2368.54 2252.83,2322.52 2267.91,2363.77 2259.47,2383.62
  region net AVCC2: 2295.71,2387.87 2288.35,2427.24 2264.96,2389.1 2269.42,2365.28
  region net AVCC2: 2331.65,2427.24 2331.65,2387.87 2361.65,2397.56 2361.65,2417.56
  region net USB1_3: 2222.66,2006.06 2202.97,2006.06 2205.3,2000.3 2220.3,2000.3
  region net D-: 2262.03,2048.94 2262.03,2033.62 2284.53,2033.78 2284.53,2048.78
  region net D+: 2262.03,2021.38 2262.03,2006.06 2284.53,2006.22 2284.53,2021.22
  region net U2_5: 3501.2,1948.35 3463.7,1948.35 3474.95,1925.85 3489.95,1925.85
  region net U2_5: 3462.75,1960.75 3484,1991.65 3462.68,2000.37 3454.04,1987.79
  region net MICAUDIO: 3518.85,1991.65 3556.35,1991.65 3545.1,2014.15 3530.1,2014.15
  region net MICAUDIO: 3556.31,1948.35 3518.81,1948.35 3530.06,1925.85 3545.06,1925.85
  region net +5V: 2212.87,2276.65 2252.24,2276.65 2242.5,2295.4 2222.5,2295.4
  region net +5V: 2252.24,2276.65 2252.24,2233.35 2282.24,2245 2282.24,2265
  region net AREF: 2541.24,2393.35 2501.87,2393.35 2510.27,2363.35 2530.27,2363.35
  region net AREF: 2502.81,2436.65 2540.31,2436.65 2529.06,2441.44 2514.06,2441.44
  region net +5V: 2792.13,2393.35 2752.76,2393.35 2762.44,2363.35 2782.44,2363.35
  region net R4_1: 3496.76,2234.75 3536.66,2204.6 3547.84,2233.76 3531.73,2245.93
  region net R4_1: 3493.34,2234.75 3536.66,2234.75 3525,2264.75 3505,2264.75
  region net MICAUDIO: 3518.81,1911.65 3556.31,1911.65 3545.06,1934.15 3530.06,1934.15
  region net U2_5: 3463.7,1911.65 3501.2,1911.65 3489.95,1934.15 3474.95,1934.15
  region net U2_5: 3462.76,1871.25 3462.76,1908.75 3440.26,1897.5 3440.26,1882.5
  region net C12_1: 3323.69,1909.15 3361.19,1909.15 3349.94,1931.65 3334.94,1931.65
  region net U2_5: 3417.24,1908.75 3417.24,1871.25 3439.74,1882.5 3439.74,1897.5
  region net MIC: 3437.25,2309.15 3437.25,2265.85 3460,2275 3460,2295
  region net U2_4: 3382.13,2265.85 3342.76,2265.85 3352.45,2235.85 3372.45,2235.85
  region net U2_4: 3342.76,2309.15 3382.13,2309.15 3367.5,2339.15 3347.5,2339.15
  region net C12_1: 3361.19,1950.85 3323.69,1950.85 3334.94,1928.35 3349.94,1928.35
  region net +5V: 3645.84,2319.75 3689.16,2319.75 3677.5,2347.5 3657.5,2347.5
  region net PWR1_1: 3689.16,2263.69 3689.16,2226.19 3711.66,2237.44 3711.66,2252.44
  region net XTAL2: 2949.65,1762.36 2949.65,1798.7 2940,1780.91 2945.3,1765
  region net XTAL1: 2949.65,1847.36 2949.65,1878.4 2927.15,1847.75 2927.15,1826.54
  region net U2_4: 3340.84,2229.74 3384.16,2229.74 3372.45,2259.74 3352.45,2259.74
  region net U2_4: 3384.16,2229.74 3384.16,2190.37 3398,2197 3398,2217
  region net MIC: 3568.34,2322.25 3611.66,2322.25 3600,2345 3580,2345
  region net R4_1: 3568.34,2227.76 3568.34,2267.13 3547.38,2257.44 3547.38,2237.44
  region net RESET: 3638.75,1814.49 3601.25,1814.49 3612.5,1795 3627.5,1795
  region net U2_4: 3383.19,2108.9 3406.81,2108.9 3405.5,2131.4 3390.5,2131.4
  region net U2_5: 3406.81,2056.9 3387.17,2043.1 3410.11,2031.72 3422.57,2040.47
  region net IO13_2: 2943.26,2076.5 2980.76,2076.5 2969.51,2099 2954.51,2099
  region net RESET: 3557.25,1818.75 3557.25,1781.25 3579.75,1792.5 3579.75,1807.5
  region net +5V: 3462.76,1778.35 3462.76,1821.65 3432.76,1810 3432.76,1790
  region net +5V: 2047.3,2253.75 2047.3,2216.25 2050,2227.5 2050,2242.5
  region net IO13: 2946.25,2197.25 2983.75,2197.25 2972.5,2219.75 2957.5,2219.75
  region net IO13_2: 2980.76,2102.76 2943.34,2102.76 2954.51,2080.26 2969.51,2080.26
  region net RX1: 2223.81,1891.65 2261.31,1891.65 2250.06,1914.15 2235.06,1914.15
  region net RX1_2: 2167.76,1851.25 2167.76,1888.75 2145.26,1877.5 2145.26,1862.5
  region net HWB: 2946.25,2337.75 2908.75,2337.75 2920,2315.25 2935,2315.25
  region net TX1: 2262.25,1813.75 2262.25,1776.25 2284.75,1787.5 2284.75,1802.5
  region net TX1_2: 2167.76,1776.25 2167.76,1813.75 2145.26,1802.5 2145.26,1787.5
  region net MICAUDIO: 3458.75,2138.19 3421.25,2138.19 3432.5,2134 3447.5,2134
  region net U1_5: 3422.93,2232.68 3460.43,2232.68 3467.3,2247.7 3451.39,2253
  region net +5V: 3290.91,2119.31 3247.6,2119.31 3259.25,2089.31 3279.25,2089.31
  region net U1_8: 3247.6,2229.55 3290.91,2229.55 3279.25,2259.55 3259.25,2259.55
  region net U1_8: 3247.6,2190.18 3247.6,2229.55 3219.13,2219.87 3219.13,2199.87
  region net U1_8: 3290.9,2313.32 3247.6,2313.32 3259.25,2283.32 3279.25,2283.32
  region net D-: 2369.33,2202.76 2369.33,2186.22 2346.83,2187 2346.83,2202
  region net SCK: 2369.33,1997.24 2369.33,2013.78 2346.83,2013.01 2346.83,1998.01
  region net MOSI: 2369.34,1965.75 2369.32,1982.29 2346.82,1981.5 2346.84,1966.5
  region net MISO: 2369.34,1934.25 2369.32,1950.79 2346.82,1950 2346.84,1935
  region net XTAL2: 2591.77,1854.33 2575.23,1854.33 2576,1831.83 2591,1831.83
  region net XTAL1: 2623.27,1854.33 2606.73,1854.33 2607.5,1831.83 2622.5,1831.83
  region net D3/SCL: 2654.77,1854.33 2638.23,1854.33 2639,1831.83 2654,1831.83
  region net D2/SDA: 2686.26,1854.33 2669.72,1854.33 2670.49,1831.83 2685.49,1831.83
  region net D0/RX: 2717.76,1854.33 2701.22,1854.33 2701.99,1831.83 2716.99,1831.83
  region net D1/TXT: 2749.25,1854.33 2732.71,1854.33 2733.48,1831.83 2748.48,1831.83
  region net D4*: 2860.86,2013.78 2860.48,1997.24 2882.99,1997.5 2883.33,2012.5
  region net D6*: 2814.21,2060.23 2814.21,2076.77 2791.71,2076 2791.71,2061
  region net IO8: 2814.24,2108.27 2814.18,2091.73 2791.69,2092.58 2791.74,2107.58
  region net D5*: 2814.4,2202.76 2814.03,2186.22 2791.55,2187.5 2791.89,2202.5
  region net A0: 2717.76,2345.48 2701.22,2345.86 2702.5,2368.33 2717.5,2367.99
  region net A2: 2654.77,2345.67 2638.23,2345.67 2639,2368.17 2654,2368.17
  region net A3: 2623.27,2345.67 2606.73,2345.67 2607.5,2368.17 2622.5,2368.17
  region net A4: 2591.77,2345.67 2575.23,2345.67 2576,2368.17 2591,2368.17
  region net A5: 2560.28,2345.67 2543.74,2345.67 2544.51,2357.01 2559.51,2357.01
  region net AVCC2: 2449.25,2305.71 2459.19,2353.76 2419.25,2374.85 2419.25,2346.57
  region net +5V: 3056.23,2132.82 3028.77,2135.12 3030,2104.91 3050,2103.24
  region net A0: 3156.28,2193.03 3128.72,2193.03 3135,2215.53 3150,2215.53
  region net D4*: 3206.19,2132.44 3178.81,2135.5 3182.5,2112.45 3197.5,2110.77
  region net U1_8: 3056.28,2371.97 3028.72,2371.97 3032.5,2341.97 3052.5,2341.97
  region net D5*: 3106.19,2370.44 3078.81,2373.5 3082.5,2350.45 3097.5,2348.77
  region net U1_5: 3206.28,2371.97 3178.72,2371.97 3185,2349.47 3200,2349.47
Bottom Layer:
  region net MIC: 3498.03,2468.57 3531.43,2501.97 3537.39,2476.75 3523.25,2462.61
  region net IO9*: 3294.14,2469.05 3270.03,2509.69 3259.17,2484.78 3267.07,2471.46
  region net IO10*: 3168.57,2501.97 3201.97,2468.57 3174.98,2464.38 3164.38,2474.98
  region net IO13: 3068.57,2501.97 3101.97,2468.57 3074.98,2464.38 3064.38,2474.98
  region net A0: 3021.03,2476.55 2974.11,2482.06 2987.5,2458.29 3002.5,2456.53
  region net A0: 2968.57,2501.97 3001.97,2468.57 2974.98,2464.38 2964.38,2474.98
  region net A1: 2879.17,2476.38 2879.17,2523.62 2865,2507.5 2865,2492.5
  region net D7: 2268.57,2501.97 2301.97,2468.57 2280.3,2469.7 2269.7,2480.3
  region net MOSI: 2098.03,1731.43 2131.43,1698.03 2135.62,1725.02 2125.02,1735.62
  region net RESET: 1926.34,1717.27 1913.84,1671.71 1939.07,1680.33 1943.63,1696.97
  region net D6*: 3494.84,1730.07 3469.82,1689.99 3459.22,1714.65 3468.03,1728.76
  region net IO12*/PD6: 3368.57,1697.03 3401.97,1730.43 3374.98,1734.62 3364.38,1724.02
  region net RESET: 3198.03,1667.56 3231.43,1700.97 3235.62,1673.98 3225.02,1663.38
  region net RESET: 3168.57,1700.97 3201.97,1667.56 3174.98,1663.38 3164.38,1673.98
  region net D1/TXT: 2968.57,1697.03 3001.97,1730.43 2974.98,1734.62 2964.38,1724.02
  region net D0/RX: 2868.57,1697.03 2901.97,1730.43 2874.98,1734.62 2864.38,1724.02
  region net D2/SDA: 2768.57,1697.03 2801.97,1730.43 2774.98,1734.62 2764.38,1724.02
  region net D-: 2299.75,2194.02 2287.02,2206.75 2284.7,2202.3 2295.3,2191.7
  region net D+: 2331,2157.06 2349,2157.06 2347.5,2148.66 2332.5,2148.66
  region net D-: 2281,2052.94 2299,2052.94 2297.5,2061.34 2282.5,2061.34
  region net D+: 2301.33,2014.96 2292.51,1999.27 2300.03,1995.5 2308.46,2010.5
  region net RESET: 2485.75,1813.02 2473.02,1825.75 2468.14,1818.75 2478.75,1808.14
  region net RESET: 2496.98,1825.75 2484.25,1813.02 2491.25,1808.14 2501.86,1818.75
  region net A0: 2721.53,2386.67 2711.86,2401.86 2719.65,2405.26 2727.91,2392.3
  region net A1: 2716.98,2419.25 2704.25,2431.98 2711.25,2436.86 2721.86,2426.25
  region net A0: 2986,2387.94 3004,2387.94 3002.5,2396.34 2987.5,2396.34
  region net D7: 2266,2297.94 2284,2297.94 2282.5,2306.34 2267.5,2306.34
  region net RX1: 2281.53,1941.67 2271.86,1956.86 2279.65,1960.26 2287.91,1947.3
  region net TX1: 2301.53,1791.67 2291.86,1806.86 2299.65,1810.26 2307.91,1797.3
  region net RX1: 2455.75,2023.02 2443.02,2035.75 2438.14,2028.75 2448.75,2018.14
  region net MOSI: 2286,1913.06 2304,1913.06 2302.5,1904.66 2287.5,1904.66
  region net RESET: 3631.98,1795.75 3619.25,1783.02 3626.25,1778.14 3636.86,1788.75
  region net TX1: 2742.06,1931 2742.06,1949 2733.66,1947.5 2733.66,1932.5
  region net D3/SCL: 2636,1812.06 2654,1812.06 2652.5,1803.66 2637.5,1803.66
  region net D2/SDA: 2671,1812.06 2689,1812.06 2687.5,1803.66 2672.5,1803.66
  region net D0/RX: 2701,1812.06 2719,1812.06 2717.5,1803.66 2702.5,1803.66
  region net D1/TXT: 2747.94,1811 2747.94,1829 2756.34,1827.5 2756.34,1812.5
  region net IO12*/PD6: 2776.98,2035.75 2764.25,2023.02 2771.25,2018.14 2781.86,2028.75
  region net D6*: 2781.53,2073.33 2771.86,2058.14 2779.65,2054.74 2787.91,2067.7
  region net IO8: 2780.47,2110.86 2774.51,2093.88 2782.66,2091.74 2788.17,2107.44
  region net D4*: 2922.94,2096 2922.94,2114 2931.34,2112.5 2931.34,2097.5
  region net D4*: 3182.06,2096 3182.06,2114 3173.66,2112.5 3173.66,2097.5
  region net D4*: 3181,2097.06 3199,2097.06 3197.5,2088.66 3182.5,2088.66
  region net D4*: 3181,1917.94 3199,1917.94 3197.5,1926.34 3182.5,1926.34
  region net MIC: 3581,2352.94 3599,2352.94 3600,2361.34 3580,2361.34
  region net MIC: 3590.75,2333.02 3578.02,2345.75 3571.38,2340.52 3585.52,2326.38
  region net MIC: 3467.94,2276 3467.94,2294 3476.34,2295 3476.34,2275
  region net U1_5: 3218.98,2309.75 3206.25,2297.02 3213.25,2292.14 3223.86,2302.75
  region net D5*: 3090.75,2318.02 3078.02,2330.75 3073.14,2323.75 3083.75,2313.14
  region net IO9*: 2921.98,2139.25 2909.25,2151.98 2916.25,2156.86 2926.86,2146.25
  region net IO10*: 2901,2192.94 2919,2192.94 2917.5,2201.34 2902.5,2201.34
  region net IO13: 2782.94,2226 2782.94,2244 2791.34,2242.5 2791.34,2227.5
  region net D5*: 2782.94,2186 2782.94,2204 2791.34,2202.5 2791.34,2187.5
  region net MICAUDIO: 3519.53,2042.82 3512.76,2026.14 3505.3,2030.09 3511.42,2045.19
  region net MICAUDIO: 3437.98,2120.75 3425.25,2108.02 3432.25,2103.14 3442.86,2113.75
  region net U1_5: 3454.06,2244 3454.06,2262 3445.66,2260.5 3445.66,2245.5
  region net +5V: 3659,2340.06 3677,2340.06 3678,2331.66 3658,2331.66
  region net +5V: 3677.5,2210.47 3659.53,2209.37 3658,2217.69 3678,2218.92
  region net D3/SCL: 2668.5,1704.98 2695.02,1731.5 2671.16,1739.45 2660.55,1728.84
  region net IO8: 3568.51,1703.98 3595.02,1730.5 3571.16,1738.45 3560.55,1727.84

## Silkscreen, mask and mechanical layers (free items; w line width, h text height)
Top Overlay:
  lines w5 net S$1945: 3465.06,2244.49 3465,2270 3475,2270 ; 3475,2270 3470,2275 3475,2270 ; 3475,2270 3470,2265 3475,2270
  lines w5 net S$1948: 3470,2275 3475,2270
  lines w5 net S$1950: 3470,2275 3475,2270
  lines w5 net S$1952: 3470,2265 3475,2270
  lines w5 net S$1973: 3330,2110 3330.07,2110 3343.51,2123.44
  lines w5 net S$1975: 3319,2121 3330,2110
  lines w5 net S$1977: 3330,2110 3330,2123.44
  lines w7.87 net S$1955: 3435,1835 3430,1840 3445,1840 3445,1860
  lines w7.87 net S$1957: 3430,1840 3435,1845
  lines w7.87 net S$1959: 3445,1860 3450.95,1858.5
  lines w7.87 net S$1961: 3450.95,1858.5 3450.95,1865.41
  text "A1" at 2962.51,2512.44 h25 r90
  text "D7" at 2362.69,2504.54 h25 r90
  text "A5" at 2562.63,2502.24 h25 r90
  text "A3" at 2762.57,2502.24 h25 r90
  text "A0" at 3062.47,2501.59 h25 r87
  text "A4" at 2662.6,2501.36 h25 r91
  text "A2" at 2862.51,2501.37 h25 r86
  text "IO9" at 3362.45,2495.84 h25 r90
  text "MIC" at 3562.54,2493.64 h25 r90
  text "IO13" at 3162.48,2481.54 h25 r90
  text "IO10" at 3262.44,2481.54 h25 r90
  text "GND" at 1962.5,2480 h25 r90
  text "GND" at 2162.63,2479.93 h25 r90
  text "GND" at 3662.51,2479.94 h25 r90
  text "+5V" at 2062.56,2474.34 h25 r90
  text "+5V" at 2262.7,2474.34 h25 r90
  text "+5V" at 3462.55,2474.34 h25 r90
  text "AREF" at 2462.66,2457.74 h25 r90
  text "Ver 1.3" at 3180,1737.5 h35
  text "RESET" at 1962.5,1655 h25 r90
  text "SCK" at 2062.49,1654.97 h25 r90
  text "MOSI" at 2162.46,1654.97 h25 r90
  text "MISO" at 2262.49,1654.97 h25 r90
  text "IO11" at 2362.53,1654.97 h25 r90
  text "GND" at 2462.5,1655 h25 r90
  text "+5V" at 2562.46,1655 h25 r90
  text "GND" at 2662.5,1654.99 h25 r90
  text "D3" at 2762.52,1654.99 h25 r90
  text "D2" at 2862.57,1654.99 h25 r90
  text "D0" at 2962.57,1655 h25 r90
  text "D1" at 3062.54,1655 h25 r90
  text "GND" at 3162.6,1654.99 h25 r90
  text "RESET" at 3262.6,1655 h25 r90
  text "D4" at 3362.57,1655 h25 r90
  text "IO12" at 3462.55,1655 h25 r90
  text "D6" at 3562.52,1655 h25 r90
  text "IO8" at 3662.5,1655 h25 r90
Document:
  lines w0.1: 2749,2099 2751,2101